# Altium PCB Stingray.pcbdoc (part 2 of 2)
Units mil, origin at the board's own origin, x right, y up, seen from the top; angles counter-clockwise.
Board outline 6200 x 5620 mil, 2 copper layers (Top Layer, Bottom Layer); 126 components, 151 nets, 467 pads, 226 vias.
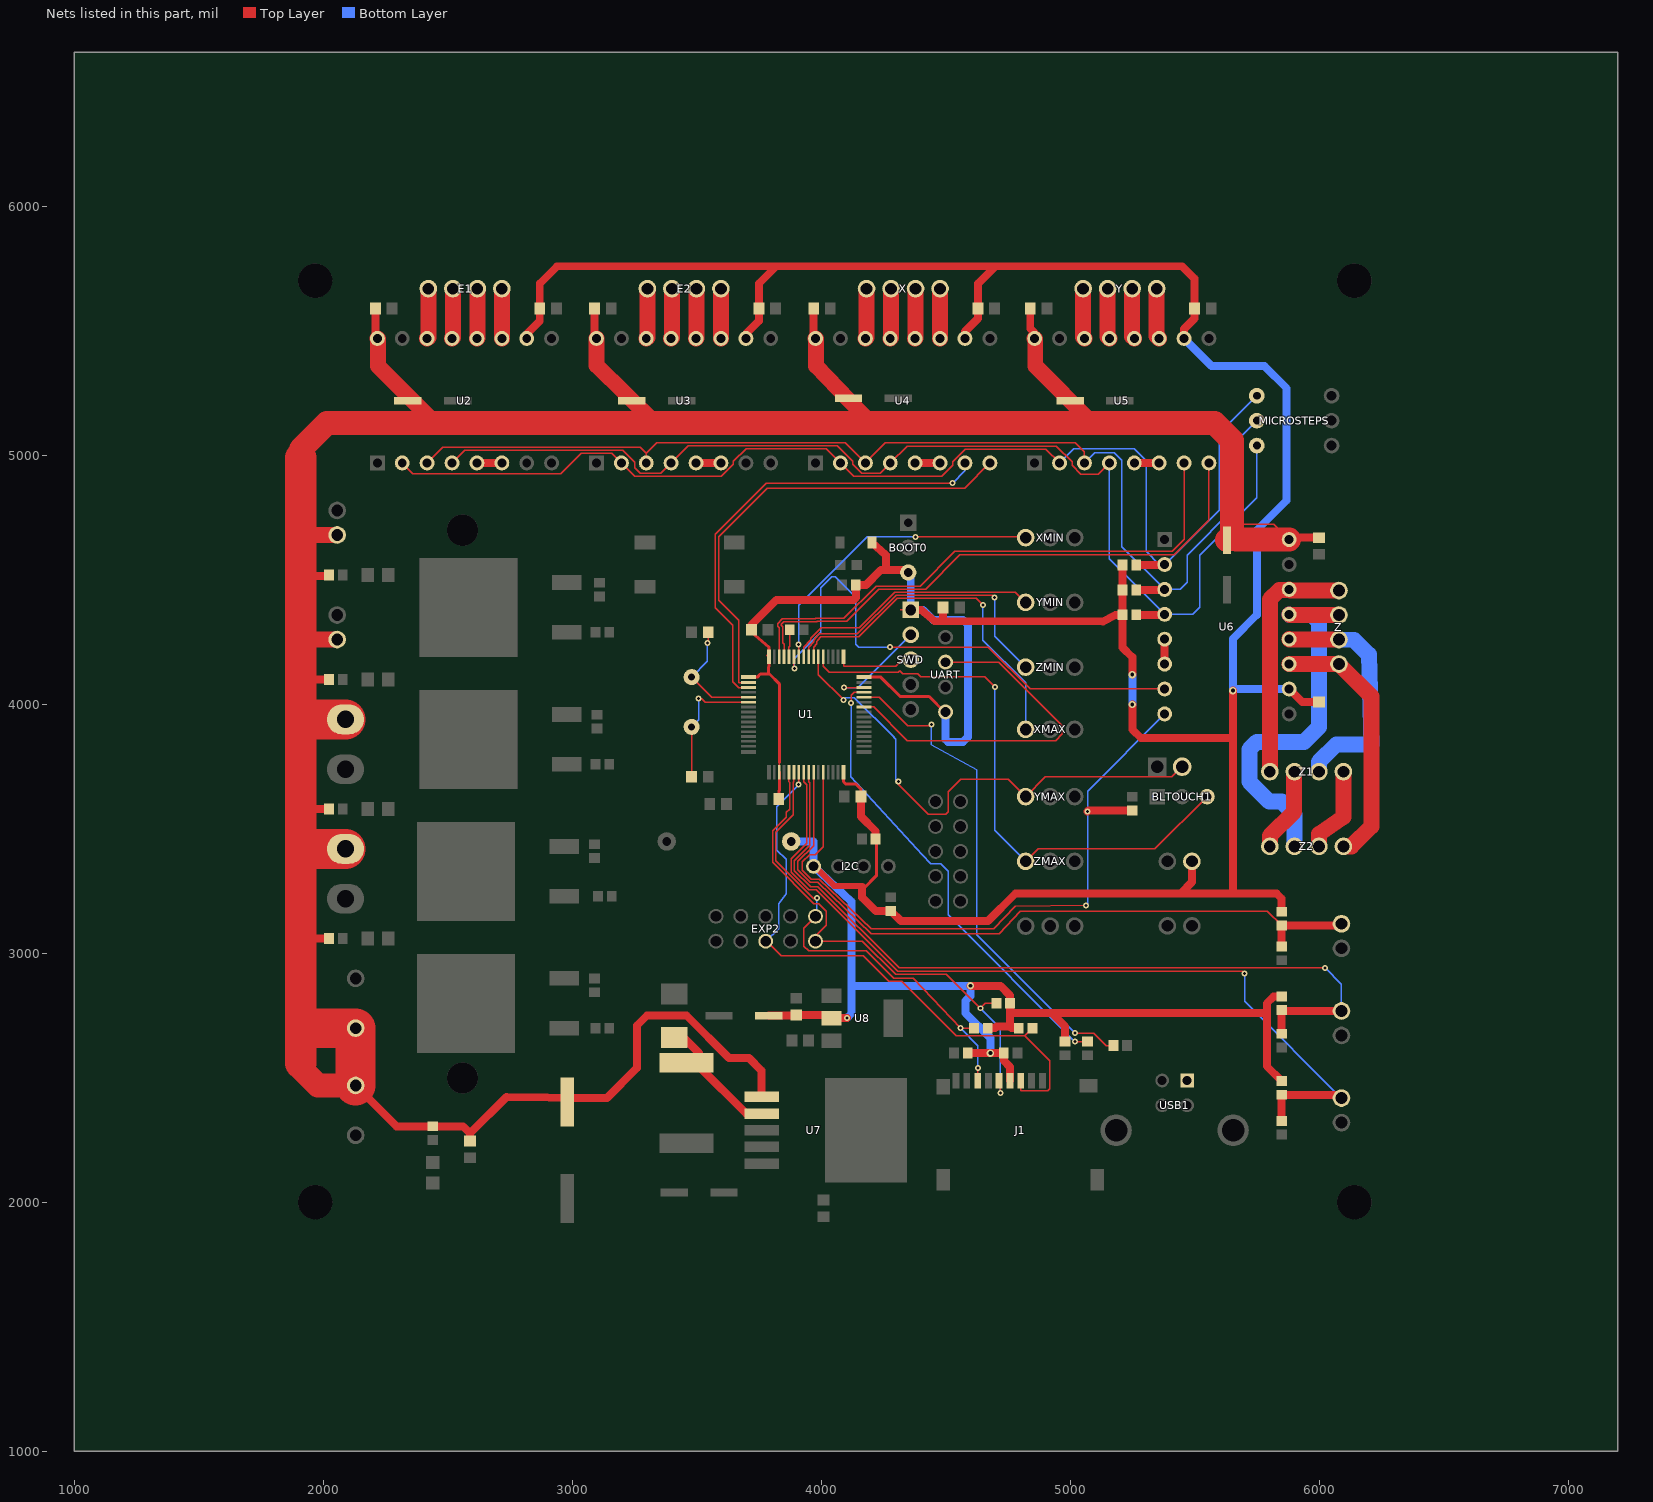
[diagram p2: the nets of this part, all layers, seen from the top]

## Via types
v1: diameter 24.4, hole 12, Top Layer to Bottom Layer, 126 vias
v2: diameter 24, hole 12, Top Layer to Bottom Layer, 50 vias
v3: diameter 40, hole 20, Top Layer to Bottom Layer, 44 vias
v4: diameter 30, hole 15, Top Layer to Bottom Layer, 6 vias

## Nets (pads, with @x,y where several pads share a name; then routed paths per layer and width w, separated by ;. In a path a pad name is that pad's centre, name@x,y a point inside that pad or via, vN(x,y) a via of type N, cw(c..) or ccw(c..) an arc to the next point about the centre after c; other vN are vias at no path point) (continued)
SPI_MISO: EXP2.1 J1.7 R31.1 U1.22 | length 1946.8
  Top Layer w6: U1.22@3891,3727.9 3891,3689.3 3888.6,3686.9 3888.6,3558.1 3817.5,3487 3817.5,3372.5 3970,3220 v2(3982.9,3222.2) ; EXP2.1@3977.6,3149.3 3930,3101.7 3930,3030 3950,3010 4181.3,3010 4291.2,2900.1 4369.9,2900.1 v2(4560,2700) ; J1.7@4629,2489 4629,2529.6 4629,2539 v2(4630,2540) ; v2(4560,2700) 4585.2,2700 ; v2(4560,2700) 4585.2,2700 ; 4585.2,2700 R31.1@4613.95,2700 4585.2,2700
  Bottom Layer w6: EXP2.1@3977.6,3149.3 3982.9,3154.6 v2(3982.9,3222.2) ; v2(4560,2700) 4630,2630 v2(4630,2540)
SPI_MOSI: EXP2.6 J1.3 R26.2 U1.23 | length 2419
  Top Layer w6: EXP2.6@3777.6,3049.3 3789.8,3040.2 3840,2990 4169,2990 4271.1,2887.9 4324,2887.9 4542.7,2669.2 4818.2,2669.2 ; v2(3910,3678.2) U1.23@3910,3727.9 ; J1.3@4802,2489 4802,2448.4 4910.4,2448.4 4919.1,2457 4919.1,2568.4 4818.2,2669.2 ; R26.2@4849.1,2700 4818.2,2669.2
  Bottom Layer w6: EXP2.6@3777.6,3049.3 3830,3100 3830,3200 3859.6,3239.9 3859.6,3377.5 3821.7,3415.5 3821.7,3589.8 v2(3910,3678.2)
SPI_SCK: EXP2.2 J1.5 R32.1 U1.21 | length 2095.5
  Top Layer w6: U1.21@3871,3727.9 3871,3689.3 3873.2,3687.1 3873.2,3580.2 3861,3568.1 3861,3547.7 3805.3,3492 3805.3,3365.4 3970.6,3200.1 3990,3200.1 4020,3170 4020,3113.1 3977.6,3070.6 3977.6,3050 4166.1,3050 4299.2,2917 4503,2917 v2(4640,2780) 4660,2800 4675.2,2800 R32.1@4703.95,2800 ; J1.5@4715,2489 4720,2484 v2(4720,2440)
  Bottom Layer w6: v2(4640,2780) 4720,2700 v2(4720,2440)
SWDCLK: SWD.3 U1.49 | length 319.6
  Top Layer w6: U1.49@4090.1,4191.9 4090.1,4153.3 4299.3,4153.3 4326,4180 SWD.3@4360,4180
SWDIO: SWD.2 U1.46 | length 435.3
  Top Layer w6: v2(4092.3,4068) U1.46@4172.1,4068
  Bottom Layer w6: v2(4092.3,4068) 4148,4068 SWD.2@4360,4280
TBED: C18.2 R15.1 TBED.2 U1.24 | length 3449
  Top Layer w6: U1.24@3930,3727.9 3930,3689.3 3942.1,3677.2 3942.1,3442.1 3880,3380 3880,3327 3951.3,3255.7 3981.2,3255.7 4307.8,2929.1 5692.1,2929.1 v2(5701.2,2920) ; R15.1@5850,2432.45 R15.1@5865.4,2432.4
  Top Layer w32: C18.2@5850,2327.5 R15.1@5850,2432.45 6076.8,2432.4 TBED.2@6090,2419.25
  Bottom Layer w6: v2(5701.2,2920) 5701.2,2808.1 TBED.2@6090,2419.25
TEXTR1: C10.2 R16.1 TEXTR1.2 U1.25 | length 3249.7
  Top Layer w6: U1.25@3950,3727.9 3950,3689.3 3954.3,3685 3954.3,3434.3 3893,3373 3893,3333 3958.2,3267.8 3986,3268 4314.7,2941.9 v2(6024.6,2941.9) ; R16.1@5850,2769.2 R16.1@5850,2772.45
  Top Layer w32: C10.2@5850,2677.5 5850,2769.2 TEXTR1.2@6090,2769.25
  Bottom Layer w6: v2(6024.6,2941.9) 6090,2876.5 TEXTR1.2@6090,2769.25
TEXTR2: C9.2 R17.1 TEXTR2.2 U1.26 | length 2855.3
  Top Layer w6: U1.26@3970,3727.9 3970,3689.3 3970,3433 3907,3370 3907,3336 3956.4,3286.6 3987.1,3286.6 4201.1,3080 4715,3080 4800,3170 5792.4,3170 R17.1@5850,3112.45
  Top Layer w32: C9.2@5850,3027.5 R17.1@5850,3112.45 6083.2,3112.4 TEXTR2.2@6090,3119.25
TX: U1.42 UART.3 | length 1472.4
  Top Layer w6: U1.42@4172.1,3990 4210.7,3990 4345.5,3855.2 4942.9,3855.2 4969.3,3881.6 4969.3,3915.1 4714.4,4170 UART.3@4500,4170
U1_60: R21.1 U1.60 | length 109.4
  Top Layer w6: U1.60@3871,4191.9 3871,4230.6 3874,4233.5 3874,4269.2 R21.1@3873.95,4300
U2_2: MICROSTEPS.6 R1.1 U2.2 U3.2 U4.2 U5.2 U6.2 | length 4702.1
  Top Layer w6: U2.2@2317.76,4970.08 2360.5,4927.4 2953.7,4927.4 3035.7,5009.3 3158.5,5009.3 U3.2@3197.76,4970.08 3251.1,4916.8 3599.8,4916.8 3647.8,4964.8 3647.8,4975.9 3699.3,5027.4 4020.4,5027.4 U4.2@4077.76,4970.08 4130.8,4917 4484.7,4917 4527.8,4960.2 4527.8,4975.4 4578.3,5025.9 4901.9,5025.9 U5.2@4957.76,4970.08
  Top Layer w32: R1.1@5266.1,4560 5377.8,4560 U6.2@5380.08,4562.24
  Bottom Layer w6: U5.2@4957.76,4970.08 5014.4,5026.7 5258.2,5026.7 5305.7,4979.2 5305.7,4615.5 5359,4562.2 U6.2@5380.08,4562.24 5598.5,4780.7 5598.5,5088.5 MICROSTEPS.6@5750,5240
U2_3: MICROSTEPS.5 R2.1 U2.3 U3.3 U4.3 U5.3 U6.3 | length 4612.4
  Top Layer w6: U2.3@2417.76,4970.08 2481.3,5033.6 3273.5,5033.6 3297.8,5009.3 ; U3.3@3297.76,4970.08 3297.8,5009.3 ; U5.3@5057.76,4970.08 5057.8,5014.5 5021.4,5050.9 4258.6,5050.9 U4.3@4177.76,4970.08 4096.1,5051.7 3340.1,5051.7 3297.8,5009.3
  Top Layer w32: R2.1@5266.1,4460 5377.8,4460 U6.3@5380.08,4462.24
  Bottom Layer w6: U5.3@5057.76,4970.08 5099.5,5011.8 5177.1,5011.8 5207.8,4981.2 5207.8,4634.5 U6.3@5380.08,4462.24 5442.2,4462.2 5470,4490 5470,4600 5660,4790 5660,5050 MICROSTEPS.5@5750,5140
U2_4: MICROSTEPS.4 R3.1 U2.4 U3.4 U4.4 U5.4 U6.4 | length 4641.4
  Top Layer w6: U2.4@2517.76,4970.08 2569.1,5021.5 3202.9,5021.5 3252.1,4972.3 3252.1,4950.6 3273.7,4928.9 3356.6,4928.9 U3.4@3397.76,4970.08 3467.3,5039.6 4064.6,5039.6 4127.8,4976.4 4127.8,4964.8 4163.4,4929.2 4236.9,4929.2 U4.4@4277.76,4970.08 4345.8,5038.1 4945.1,5038.1 5007.8,4975.4 5007.8,4960.2 5042.4,4925.6 5113.3,4925.6 U5.4@5157.76,4970.08
  Top Layer w32: R3.1@5266.1,4360 5377.8,4360 U6.4@5380.08,4362.24
  Bottom Layer w6: U5.4@5157.76,4970.08 5157.8,4584.6 U6.4@5380.08,4362.24 5492.2,4362.2 5520,4390 5520,4600 5750,4830 MICROSTEPS.4@5750,5040
U2_5: U2.5 U2.6 | length 100
  Top Layer w32: U2.5@2617.76,4970.08 U2.6@2717.76,4970.08
U2_11: E1.4 U2.11 | length 199.9
  Top Layer w64: E1.4@2717.7,5670 2717.7,5470.2 U2.11@2717.76,5470.08
U2_12: E1.3 U2.12 | length 200.5
  Top Layer w64: U2.12@2617.76,5470.08 2619.3,5471.6 E1.3@2619.3,5670
U2_13: E1.2 U2.13 | length 201.2
  Top Layer w64: U2.13@2517.76,5470.08 2520.9,5473.2 E1.2@2520.9,5670
U2_14: E1.1 U2.14 | length 201.8
  Top Layer w64: U2.14@2417.76,5470.08 2422.4,5474.7 E1.1@2422.35,5670
U3_5: U3.5 U3.6 | length 100
  Top Layer w32: U3.5@3497.76,4970.08 U3.6@3597.76,4970.08
U3_11: E2.4 U3.11 | length 199.9
  Top Layer w64: E2.4@3597.7,5670 3597.7,5470.2 U3.11@3597.76,5470.08
U3_12: E2.3 U3.12 | length 200.5
  Top Layer w64: U3.12@3497.76,5470.08 3499.3,5471.6 E2.3@3499.3,5670
U3_13: E2.2 U3.13 | length 201.2
  Top Layer w64: U3.13@3397.76,5470.08 3400.9,5473.2 E2.2@3400.9,5670
U3_14: E2.1 U3.14 | length 201.8
  Top Layer w64: U3.14@3297.76,5470.08 3302.4,5474.7 E2.1@3302.35,5670
U4_5: U4.5 U4.6 | length 100
  Top Layer w32: U4.5@4377.76,4970.08 U4.6@4477.76,4970.08
U4_11: U4.11 X.4 | length 199.9
  Top Layer w64: X.4@4477.7,5670 4477.7,5470.2 U4.11@4477.76,5470.08
U4_12: U4.12 X.3 | length 200.5
  Top Layer w64: U4.12@4377.76,5470.08 4379.3,5471.6 X.3@4379.3,5670
U4_13: U4.13 X.2 | length 201.2
  Top Layer w64: U4.13@4277.76,5470.08 4280.9,5473.2 X.2@4280.9,5670
U4_14: U4.14 X.1 | length 201.8
  Top Layer w64: U4.14@4177.76,5470.08 4182.4,5474.7 X.1@4182.35,5670
U5_5: U5.5 U5.6 | length 100
  Top Layer w32: U5.5@5257.76,4970.08 U5.6@5357.76,4970.08
U5_11: U5.11 Y.4 | length 204.1
  Top Layer w64: Y.4@5347.7,5670 5347.7,5480.2 U5.11@5357.76,5470.08
U5_12: U5.12 Y.3 | length 203.4
  Top Layer w64: Y.3@5249.3,5670 5249.3,5478.6 U5.12@5257.76,5470.08
U5_13: U5.13 Y.2 | length 202.8
  Top Layer w64: Y.2@5150.9,5670 5150.9,5477 U5.13@5157.76,5470.08
U5_14: U5.14 Y.1 | length 202.1
  Top Layer w64: Y.1@5052.35,5670 5052.4,5475.5 U5.14@5057.76,5470.08
U6_5: U6.5 U6.6 | length 100
  Top Layer w32: U6.6@5380.08,4162.24 U6.5@5380.08,4262.24
U7_2: D1.2 L5.1 U7.2 | length 510.4
  Top Layer w32: D1.2@3410,2663 3447,2663 3510,2600 3510,2546 3699.1,2356.9 U7.2@3762,2356.9
undefined: 
USB_VCC: USB1.1
USBDM: R22.1 U1.44 | length 2004.9
  Top Layer w6: U1.44@4172.1,4029 4233.5,4029 4347,3915.5 4438.5,3915.5 v2(4442.5,3919.5) ; v2(5020,2680) 5095.2,2680 5145.2,2630 R22.1@5173.95,2630
  Bottom Layer w6: v2(4442.5,3919.5) 4442,3838 4624.6,3737.4 4624.6,3075.4 v2(5020,2680)
USBDP: R18.1 U1.45 | length 1885.3
  Top Layer w6: v2(4120.9,4005.6) 4120.9,4036.5 4133.4,4049 U1.45@4172.1,4049 ; v2(5020.4,2646) R18.1@5070,2646.05
  Bottom Layer w6: v2(4120.9,4005.6) 4120,3710 4406.4,3396.8 4440,3360 4480,3360 4510,3330 4510,3155.2 5019.2,2646 v2(5020.4,2646)
VCC: +3.3V.2 BOOT0.3 C12.1 C13.1 C14.1 C15.1 C16.1 C19.2 C23.1 C24.1 C25.1 C26.1 C27.1 D5.2 I2C.1 J1.4 L1.1 R1.2 R2.2 R3.2 R15.2 R16.2 R17.2 R19.2 R23.1 R25.1 R26.1 R27.2 R28.2 R30.2 R31.2 R32.2 SWD.1 U1.1 U1.19 U1.32 U1.48 U1.64 U2.10 U3.10 U4.10 U5.10 U6.10 U8.2 UART.1 | length 19492.8
  Top Layer w6: C13.1@3734.7,5590 C13.1@3750.1,5590 ; U1.64@3790.1,4191.9 U1.64@3790.1,4211.3 ; U1.19@3832,3727.9 3832,3766.6 ; R19.2@4139.1,4480 4144.2,4480 R19.2@4149.3,4480 ; U1.48@4172.1,4109.9 U1.48@4191.4,4109.9 ; 4317.4,4380 SWD.1@4360,4380 SWD.1@4381.3,4380 ; C14.1@4614.7,5590 C14.1@4630.1,5590 ; R23.1@4734,2594.5 R23.1@4733.95,2600 ; 4759.1,2706.1 4765.2,2700 ; C15.1@5484.7,5590 C15.1@5500.1,5590 ; 5489.3,3266.1 +3.3V.2@5489.3,3370 ; R17.2@5850,3167.5 5850,3196.3
  Top Layer w12: U1.1@3708.1,4109.9 3743.7,4109.9 3755.8,4122 3788.3,4122 ; C24.1@3720.05,4300 3720,4290 3790,4230 U1.64@3790.1,4191.9 ; U1.64@3784.4,4197.6 U1.64@3790.1,4191.9 ; 3790,4122 3788.3,4122 ; C26.1@3830.1,3620 3830.1,3652.7 3832,3654.6 U1.19@3832,3727.9 ; 3832,3766.6 3832,4083 3792.4,4122.6 3788.3,4122 ; U1.32@4090.1,3727.9 4090.1,3689.9 4100,3680 4140,3680 4160,3660 C25.1@4160.05,3630 C25.1@4160.1,3630 ; 4164.9,3271.8 4173.3,3263.3 4222,3312 4222,3460 R28.2@4219.05,3460 ; U1.48@4172.1,4109.9 4240,4109.9 ; 4240,4110 4240,4109.9 ; UART.1@4500,3970 4496,3970 4434,4032 4317.9,4032 4240,4109.9 ; 3788.3,4122 3788.3,4151.5 3790.1,4153.3 U1.64@3790.1,4191.9
  Top Layer w24: I2C.1@3970,3350 3972,3352 4052.2,3271.8 4164.9,3271.8
  Top Layer w32: U2.10@2817.76,5470.08 2817.8,5487.8 2870,5540 2870,5589.9 2870.1,5590 C12.1@2870.05,5590 2870,5690 2940,5760 3820,5760 ; U3.10@3697.76,5470.08 3697.8,5487.8 3750,5540 3750,5589.9 3750.1,5590 C13.1@3750.05,5590 3750,5690 3820,5760 ; C24.1@3720.05,4300 3720,4320 3820,4420 4130,4420 4140,4430 R19.2@4139.05,4480 ; C27.1@3790,2750 3897,2750 C19.2@3900,2753.05 4028.9,2753 U8.2@4041.95,2740 ; U8.2@4051.6,2740 v2@4100,2740 ; 4090.4,2740 4091.5,2741.1 v2(4104.1,2741.1) ; R19.2@4139.1,4480 4180,4480 4240,4540 4340,4540 BOOT0.3@4350,4530 ; C25.1@4160.1,3630 4160,3629.9 4160,3550 4219.1,3490.9 R28.2@4219.1,3460 ; 4164,3268 4164.9,3225.1 4220,3170 4220.95,3170.95 R27.2@4280,3170.95 4320.95,3130 4670,3130 4780,3240 5442.2,3240 5489.3,3287.1 5489.3,3287.2 +3.3V.2@5489.3,3370 ; D5.2@4204,4650 4260,4600 4260,4542.6 4257.4,4540 ; SWD.1@4381.3,4380 4402.6,4380 4455.7,4335.2 5132,4334 5182.2,4360 R3.2@5210.95,4360 ; C23.1@4490.1,4390 4490.1,4335.9 4490.8,4335.1 ; U4.10@4577.76,5470.08 4577.8,5497.8 4590,5510 4630,5550 4630,5589.9 4630.1,5590 4630.1,5690 4700,5760 ; R30.2@4589.1,2600 v4(4680,2600) 4728.4,2600 4734,2594.5 4734,2569.2 4759,2544.1 J1.4@4759,2489 ; v4(4600,2870) 4720,2870 4759.1,2830.9 4759.1,2800 4759.1,2734.2 ; R31.2@4669.1,2700 4697.8,2700 4704,2706.1 4759.1,2706.1 4759.1,2734.2 ; 4765.2,2700 R26.1@4793.95,2700 ; R25.1@4980,2646.05 4980,2674.8 4980,2707.5 4927.5,2760 ; R1.2@5210.95,4560 R2.2@5210.95,4460 R3.2@5210.95,4360 ; v4(5250,4000) 5250,3900 5285.4,3864.6 5654,3864.6 ; v4(5250,4120) 5250,4190 5211,4229 R3.2@5210.95,4360 ; 5428.6,3240 5830,3240 5850,3220 R17.2@5850,3167.5 ; U5.10@5457.76,5470.08 5457.8,5507.8 5500,5550 5500,5589.9 5500.1,5590 C15.1@5500.05,5590 5500,5710 5450,5760 4700,5760 ; 5654,3240 v4(5654.03,4055.97) ; 5790,2761.6 5788.4,2760 4927.5,2760 ; R15.2@5850,2487.5 5790,2547.5 5790,2800 5817.6,2827.5 R16.2@5850,2827.5 ; U6.10@5880.08,4062.24 5932.4,4009.9 C16.1@6000,4009.9 ; 3820,5760 4700,5760 ; 4759.1,2734.2 4759.1,2760 4927.5,2760
  Bottom Layer w32: L1.1@3880,3450 3970,3450 I2C.1@3970,3350 ; v2@4104.1,2741 4121.3,2758.3 4121.3,3208.7 I2C.1@3970,3350 ; 4121.3,2870.2 4599.8,2870.2 v4(4600,2870) 4600,2830 4580,2810 4580,2760 4680,2660 v4(4680,2600) ; BOOT0.3@4350,4530 4360,4520 SWD.1@4360,4380 4410,4380 4450,4340 4570,4340 4590,4320 4590,3870 4570,3850 4510,3850 4500,3860 UART.1@4500,3970 ; v4(5250,4000) v4(5250,4120) ; U5.10@5457.76,5470.08 5567.8,5360 5780,5360 5870,5270 5870,4820 5750,4700 5750,4360 5654,4264 v4(5654.03,4055.97) 5660.3,4062.2 U6.10@5880.08,4062.24 ; I2C.1@3970,3350 3970,3360 I2C.1@3970,3350
VIN: C1.1 C2.1 C3.1 C4.1 C5.1 C6.1 C7.1 C8.1 C17.1 C33.2 C34.1 C35.1 EXTRUDER1.1 EXTRUDER2.1 FAN1.2 FAN2.2 HEATBED.1 POWER.2 R5.1 R6.1 R11.1 R14.1 R24.1 U2.16 U3.16 U4.16 U5.16 U6.16 U7.1 | length 14242.4
  Top Layer w6: C34.1@2980,2404 2980,2420 3080,2420 3080,2419 3080,2424 ; C17.1@3207.9,5220 C17.1@3240,5220 ; C3.1@4057.9,5220 4057.9,5230 C3.1@4110,5230 ; C2.1@4967.9,5220 4984,5220 C2.1@5000,5220 ; C1.1@5630,4660 5630,4724.2 5790.9,4724.2 5818.1,4724.2 U6.16@5880.08,4662.24
  Top Layer w32: 1900,3062.7 1902.7,3060 R5.1@2023.95,3060 ; 1900,3583 1903,3580 R6.1@2023.95,3580 ; 1900,4090.5 1909.5,4100 R11.1@2023.95,4100 ; 1900,4515.2 2019.1,4515.2 R14.1@2021.3,4517.4 ; POWER.2@2130.71,2470 2294.7,2306 R24.1@2440,2306.05 2561.6,2306 2590,2277.6 ; C4.1@2210.1,5590 2210.1,5477.8 U2.16@2217.76,5470.08 ; C33.2@2590,2246.85 2590,2277.6 ; C34.1@2980,2404 2980,2420 3140,2420 3260,2540 3260,2710 3300,2750 3460,2750 3630,2580 3710,2580 3760,2530 3760,2425.9 U7.1@3762,2423.9 ; 3072.11,2420 2736.4,2424 2590,2277.6 ; C5.1@3090.1,5590 3090.1,5477.8 U3.16@3097.76,5470.08 ; C6.1@3970.1,5590 3970.1,5477.8 U4.16@3977.76,5470.08 ; C7.1@4840,5581.6 4840,5510 4857.8,5492.2 U5.16@4857.76,5470.08 ; U6.16@5880.08,4662.24 5887.8,4669.9 C8.1@6000,4669.9
  Top Layer w64: 1900,4250.9 1909.8,4260.7 2003.7,4260.7 FAN1.2@2056.4,4260.7 ; 1900,4685.1 1904.4,4680.7 FAN2.2@2056.4,4680.7 ; U2.16@2217.76,5470.08 2220,5467.8 2220,5360 2340,5240 2450,5130 ; U3.16@3097.76,5470.08 3097.8,5362.2 3335,5130 ; U4.16@3977.76,5470.08 3980,5467.8 3980,5360 4200,5130 ; U5.16@4857.76,5470.08 4860,5467.8 4860,5360 5090,5130
  Top Layer w96: 1900,2550 1980,2470 POWER.2@2130.71,2470 ; 1910,5024.8 2015.2,5130 4075.9,5130 ; 4019.6,5130 4075.9,5130 ; C1.1@5630,4660 5650,4680 ; U6.16@5880.08,4662.24 5667.8,4662.2 5650,4680 ; 4075.9,5130 4200,5130 5090,5130 5580,5130 5650,5060 5650,4680
  Top Layer w128: 1910,2560 1910,4990
  Top Layer w160: 1940,3420 1930,3420 EXTRUDER1.1@2090,3420 ; 2010,3940 1930,3940 EXTRUDER2.1@2090,3940 ; 2040,2700 1940,2700 HEATBED.1@2130.71,2700 POWER.2@2130.71,2470
X_DIR: U1.2 U4.8 | length 1870.1
  Top Layer w6: U1.2@3708.1,4088 3669.4,4088 3669.4,4338 3588.1,4419.3 3588.1,4672.9 3783.6,4868.4 4576.1,4868.4 U4.8@4677.76,4970.08
X_STP: U1.3 U4.7 | length 1834.2
  Top Layer w6: U1.3@3708.1,4068 3669.4,4068 3645.1,4092.3 3645.1,4317.7 3574.4,4388.4 3574.4,4684 3779.9,4889.5 v2(4528.3,4889.5)
  Bottom Layer w6: v2(4528.3,4889.5) 4577.8,4939 U4.7@4577.76,4970.08
XMAX: U1.55 XMAX.1 | length 1389.6
  Top Layer w6: U1.55@3970,4191.9 3970,4230.6 3982.9,4243.5 3982.9,4253 3985.6,4255.7 3985.6,4258.8 3998,4271.2 4150.6,4271.2 4306.3,4426.9 4623.1,4426.9 v2(4650,4400)
  Bottom Layer w6: v2(4650,4400) 4650,4258.6 4821.6,4087 XMAX.1@4821.55,3900
XMIN: U1.58 XMIN.1 | length 1232.8
  Top Layer w6: U1.58@3910,4191.9 v2(3910,4240.7) ; v2(4378.8,4672.9) 4818.7,4672.9 XMIN.1@4821.55,4670
  Bottom Layer w6: v2(3910,4240.7) 3910,4398.1 4184.8,4672.9 v2(4378.8,4672.9)
Y1_1: C20.1 U1.6 Y1.1 | length 531.2
  Top Layer w6: Y1.1@3480,3910 3480.1,3909.9 C20.1@3480.1,3710 ; v2(3508.4,4023.6) 3521.1,4023.6 3535.7,4009 U1.6@3708.1,4009
  Bottom Layer w6: Y1.1@3480,3910 3508.4,3938.4 v2(3508.4,4023.6)
Y1_2: C11.1 U1.5 Y1.2 | length 469.4
  Top Layer w6: Y1.2@3480,4110 3561,4029 U1.5@3708.1,4029 ; v2(3543.1,4247.8) 3546.9,4251.6 C11.1@3546.9,4290
  Bottom Layer w6: Y1.2@3480,4110 3543.1,4173.1 v2(3543.1,4247.8)
Y_DIR: U1.61 U5.8 | length 2256
  Top Layer w6: U1.61@3851,4191.9 3851,4242.7 3845.2,4248.5 3845.2,4313 3839.3,4318.8 3839.3,4321.3 3849.4,4331.4 3982.2,4331.4 3984.1,4333.3 4102.2,4333.3 4232.1,4463.3 4419.8,4463.3 4557.8,4601.4 5418.6,4601.4 5557.8,4740.6 U5.8@5557.76,4970.08
Y_STP: U1.62 U5.7 | length 2214.5
  Top Layer w6: U1.62@3832,4191.9 3832,4230.6 3832,4309 3826,4315 3826,4325.1 3844.4,4343.5 3977.2,4343.5 3979.1,4345.5 4091.7,4345.5 4221.6,4475.4 4397.6,4475.4 4537.4,4615.2 5409.9,4615.2 5457.8,4663.1 U5.7@5457.76,4970.08
YMAX: BLTOUCH2.2 U1.54 YMAX.1 | length 2059.8
  Top Layer w6: U1.54@3989,4191.9 3989,4119.6 v2(4090.1,4018.5) ; v1(4310,3690) 4310,3680 4430,3560 4500,3560 4510,3570 4510,3650 4560,3700 4590,3700 4751.6,3700 YMAX.1@4821.55,3630 4900.7,3709.1 5409.2,3709.1 BLTOUCH2.2@5450,3750
  Bottom Layer w6: v2(4090.1,4018.5) 4099.3,4027.7 4133.9,4027.7 4292.9,3868.7 ; 4290.8,3870.8 4290.8,3869.2 4300,3860 4300,3700 v1(4310,3690)
YMIN: U1.57 YMIN.1 | length 1042.8
  Top Layer w6: U1.57@3930,4191.9 3930,4230.6 3958.7,4259.3 3958.7,4266.2 4001.5,4309.1 4153.6,4309.1 4295.7,4451.2 4780.4,4451.2 YMIN.1@4821.55,4410
Z1_1: U6.14 Z1.1 Z.1 | length 988.3
  Top Layer w64: Z1.1@5802.35,3730 5802.4,4422.3 5840,4460 5877.8,4460 U6.14@5880.08,4462.24 5884.7,4457.6 Z.1@6080,4457.65
Z1_2: Z1.2 Z2.1 | length 340.8
  Top Layer w64: Z2.1@5802.35,3430 5802.4,3472.3 5900,3570 5900,3729.1 Z1.2@5900.9,3730
Z1_3: U6.12 Z1.3 Z.3 | length 985
  Top Layer w64: U6.12@5880.08,4262.24 5881.6,4260.7 Z.3@6080,4260.7
  Bottom Layer w64: Z1.3@5999.3,3730 5999.3,3769.2 6070,3840 6210,3840 6200,4200 6140,4260 6080.8,4260 Z.3@6080,4260.7
Z1_4: Z1.4 Z2.3 | length 351.2
  Top Layer w64: Z2.3@5999.3,3430 6000,3480 6097.7,3547.7 Z1.4@6097.7,3730
Z2_2: U6.13 Z2.2 Z.2 | length 1565.9
  Top Layer w64: U6.13@5880.08,4362.24 5883.2,4359.1 Z.2@6080,4359.1
  Bottom Layer w64: U6.13@5880.08,4362.24 5882.3,4360 5970,4360 6000,4330 6000,3910 5940,3850 5750,3850 5720,3820 5720,3690 5800,3610 5850,3610 5900.9,3559.1 Z2.2@5900.9,3430
Z2_4: U6.11 Z2.4 Z.4 | length 1051.5
  Top Layer w64: U6.11@5880.08,4162.24 5880.2,4162.3 6080,4162.3 6210,4032.3 6210,3510 6130,3430 Z2.4@6097.7,3430
Z_DIR: R29.1 U1.28 U6.8 | length 2806.2
  Top Layer w6: U1.28@4009,3727.9 4009,3428.2 3977.1,3396.3 3955.3,3396.3 3925,3369 3925,3335 3961,3299 3992.6,3298.8 4200.9,3100 4694,3098.8 4780,3190 v2(5063.9,3193.2)
  Top Layer w32: v2(5070,3570) 5074,3573.9 R29.1@5250,3573.9
  Bottom Layer w6: v2@5070,3193.9 v2(5070,3570) 5063.9,3570 5063.9,3569.3 5070,3569.3 5070,3652.1 U6.8@5380.08,3962.24
Z_STP: U1.59 U6.7 | length 2115.9
  Top Layer w6: U1.59@3891,4191.9 3891,4153.3 3892.4,4151.9 v2(3892.4,4144.2) ; v2(4277,4230) 4671.6,4230 4839.3,4062.2 U6.7@5380.08,4062.24
  Bottom Layer w6: v2(3892.4,4144.2) 3892.4,4184.5 3998.4,4290.5 3998.4,4469.3 4043.1,4514 4056.7,4514 4139.6,4431.1 4139.6,4241.7 4151.8,4229.6 4276.6,4229.6 v2(4277,4230)
ZMAX: BLTOUCH1.3 U1.53 ZMAX.1 | length 2354.8
  Top Layer w6: U1.53@4009,4191.9 4009,4153.3 4033.5,4128.8 4309.1,4128.8 4315.2,4134.9 4327.5,4122.6 4387.9,4122.6 4400,4110.4 4658.1,4110.4 v2(4697.6,4071) ; ZMAX.1@4821.55,3370 4871.9,3420.3 5340.3,3420.3 BLTOUCH1.3@5550,3630
  Bottom Layer w6: v2(4697.6,4071) 4697.6,3494 ZMAX.1@4821.55,3370
ZMIN: U1.56 ZMIN.1 | length 1213
  Top Layer w6: U1.56@3950,4191.9 3950,4230.6 3970.8,4251.4 3970.8,4258.1 3973.5,4260.7 3973.5,4263.9 3992.9,4283.3 4145.6,4283.3 4301.3,4439 4687.8,4439 v2(4696.9,4429.9)
  Bottom Layer w6: v2(4696.9,4429.9) 4696.9,4274.6 ZMIN.1@4821.55,4150
pads on no net: U8.4
copper on no net:
  other v1: 2442.67,2667.33 2508.33,2667.33 2574,2667.33 2639.67,2667.33 2705.33,2667.33 2442.67,2733.67 2508.33,2733.67 2574,2733.67 2639.67,2733.67 2705.33,2733.67 2442.67,2800 2508.33,2800 2574,2800 2639.67,2800 2705.33,2800 2442.67,2866.33 2508.33,2866.33 2574,2866.33 2639.67,2866.33 2705.33,2866.33 2442.67,2932.67 2508.33,2932.67 2574,2932.67 2639.67,2932.67 2705.33,2932.67 2442.67,3197.33 2508.33,3197.33 2574,3197.33 2639.67,3197.33 2705.33,3197.33 2442.67,3263.67 2508.33,3263.67 2574,3263.67 2639.67,3263.67 2705.33,3263.67 2442.67,3330 2508.33,3330 2574,3330 2639.67,3330 2705.33,3330 2442.67,3396.33 2508.33,3396.33 2574,3396.33 2639.67,3396.33 2705.33,3396.33 2442.67,3462.67 2508.33,3462.67 2574,3462.67 2639.67,3462.67 2705.33,3462.67 2452.67,3727.33 2518.33,3727.33 2584,3727.33 2649.67,3727.33 2715.33,3727.33 2452.67,3793.67 2518.33,3793.67 2584,3793.67 2649.67,3793.67 2715.33,3793.67 2452.67,3860 2518.33,3860 2584,3860 2649.67,3860 2715.33,3860 2452.67,3926.33 2518.33,3926.33 2584,3926.33 2649.67,3926.33 2715.33,3926.33 2452.67,3992.67 2518.33,3992.67 2584,3992.67 2649.67,3992.67 2715.33,3992.67 2452.67,4257.33 2518.33,4257.33 2584,4257.33 2649.67,4257.33 2715.33,4257.33 2452.67,4323.67 2518.33,4323.67 2584,4323.67 2649.67,4323.67 2715.33,4323.67 2452.67,4390 2518.33,4390 2584,4390 2649.67,4390 2715.33,4390 2452.67,4456.33 2518.33,4456.33 2584,4456.33 2649.67,4456.33 2715.33,4456.33 2452.67,4522.67 2518.33,4522.67 2584,4522.67 2649.67,4522.67 2715.33,4522.67

## Polygon pours and split planes (outlines as drawn)
VIN on Bottom Layer (solid): 1760,4730 2160,4720 2260,4650 2260,2480 2200,2400 1960,2400 1790,2400
GND on Bottom Layer (solid): 1500,6090 6670,6120 6700,1570 1640,1500

## Other copper
Top Layer:
  region net VIN: 1950,2680 2080,2640 2070,2490 1970,2500
  region net LED1_2: 2180,2810 2380,2600 2420,2860
  region net LED2_2: 2140,3290 2380,3530 2450,3280 2450,3290
  region net LED3_2: 2140,3820 2390,4060 2460,3810
  region net GND: 3730,2150 3860,2150 3850,2110 3760,2110
Bottom Layer:
  rectangle: 2387,4191 2780,4589
  rectangle: 2387,3664 2780,4060
  rectangle: 2377,3130 2770,3529
  rectangle: 2377,2600 2770,2999
  rectangle: 4017,2077 4346,2497

## Silkscreen, mask and mechanical layers (free items; w line width, h text height)
Top Overlay:
  text "Reset" at 3329.3,4800.01 h80 r359
  text "GND" at 4870,2933 h45
  text "+5V" at 5020,2933 h45
  text "signal" at 4669.21,2930.91 h45 r358
  text "+" at 2358.28,2501.72 h80 r45
  text "-" at 2350,2200 h80 r180
Bottom Overlay:
  drawing of 207 lines, arcs and shapes, not listed
  text "B2" at 2451.88,5723.64 h60
  text "B1" at 2550.85,5723.64 h60
  text "A1" at 2655.27,5723.64 h60
  text "A2" at 2785.29,5723.66 h60 r2
  text "B2" at 3331.03,5720 h60
  text "B1" at 3430,5720 h60
  text "A1" at 3534.42,5720 h60
  text "A2" at 3664.44,5720.02 h60 r2
  text "B2" at 4211.03,5720 h60
  text "B1" at 4310,5720 h60
  text "A1" at 4414.42,5720 h60
  text "A2" at 4544.44,5720.02 h60 r2
  text "B2" at 5081.03,5720 h60
  text "B1" at 5180,5720 h60
  text "A1" at 5284.42,5720 h60
  text "A2" at 5414.44,5720.02 h60 r2
  text "Y" at 4912.94,5699.02 h80 r21
  text "E1" at 2259.46,5696.36 h80
  text "E2" at 3128.61,5696.36 h80
  text "X" at 4028.61,5696.36 h80
  text "MICROSPEPS" at 6117.41,5392.95 h45
  text "MO" at 6125.91,5211.04 h45 r270
  text "M1" at 6125.92,5115.52 h45 r268
  text "M2" at 6127.5,5000 h45 r270
  text "FAN2" at 2313.64,4870 h80 r90
  text "EXP1 pins" at 3612.18,4802.73 h80
  text "BOOT0" at 4492,4776.4 h80
  text "GND" at 4954.96,4732.95 h45
  text "+5V" at 5095.18,4732.95 h45
  text "GND" at 4554.96,4702.95 h45
  text "+" at 2162.73,4687.5 h45 r135
  text "+5V" at 3383.54,4679.09 h45
  text "GND" at 3724.95,4672.95 h45
  text "WORK" at 4251.02,4652.95 h45 r359
  text "Boot0" at 4620.82,4622.95 h45
  text "Z" at 6167.22,4586.38 h80 r2
  text "XMIN" at 4880,4577.5 h45
  text "LCD7" at 3383,4572.95 h45
  text "LCD6" at 3720.95,4572.95 h45
  text "PRG" at 4554.96,4552.95 h45
  text "+3.3V" at 4294.91,4502.95 h45
  text "LCD5" at 3383.54,4475.45 h45
  text "LCD4" at 3715.04,4472.95 h45
  text "GND" at 4954,4468.5 h45
  text "+5V" at 5094.23,4468.5 h45
  text "FAN1" at 2310,4450 h80 r90
  text "B2" at 6130,4428.97 h60 r270
  text "+" at 2162.73,4377.5 h45 r135
  text "LCD_RS" at 3383.54,4366.48 h45
  text "LCD_E" at 3711.27,4362.96 h45
  text "+3.3V" at 4284.91,4352.95 h45
  text "B1" at 6130,4330 h60 r270
  text "YMIN" at 4879.43,4313.05 h45 r1
  text "BEEPER" at 3713.18,4262.95 h45
  text "ENC_BTN" at 3383.54,4257.5 h45
  text "SWDIO" at 4284.91,4252.95 h45
  text "Rx" at 4645.03,4252.95 h45 r1
  text "A1" at 6130,4225.58 h60 r270
  text "GND" at 4954,4208.5 h45
  text "+5V" at 5094.23,4208.5 h45
  text "Tx" at 4650,4157.5 h45
  text "SWCLK" at 4287.41,4152.95 h45
  text "A2" at 6130.02,4095.56 h60 r272
  text "GND" at 4284.96,4052.95 h45
  text "ZMIN" at 4879.04,4053.05 h45
  text "GND" at 4684.96,4042.95 h45
  text "EXTR2" at 2360,3990 h80 r90
  text "GND" at 4954,3959.5 h45
  text "+5V" at 5094.23,3959.5 h45
  text "NRST" at 4285.04,3942.95 h45
  text "+3.3" at 4708.68,3942.95 h45
  text "+" at 2268.28,3911.72 h80 r45
  text "BlTouch" at 5233.64,3890 h80 r90
  text "Z1" at 6165.82,3886.36 h80
  text "SWD" at 4405.18,3842.95 h45
  text "UART" at 4598.75,3842.95 h45 r359
  text "Zmin" at 5550.34,3830.91 h45 r359
  text "GND" at 5364.96,3822.95 h45
  text "XMAX" at 4903.23,3802.95 h45
  text "B2" at 5831.03,3780 h60
  text "B1" at 5930,3780 h60
  text "A1" at 6034.42,3780 h60
  text "A2" at 6164.44,3780.02 h60 r2
  text "GND" at 4954,3688.5 h45
  text "+5V" at 5094.23,3688.5 h45
  text "YMAX" at 4907.32,3532.96 h45
  text "GND" at 5370,3517.5 h45
  text "+5V" at 5524.18,3515.95 h45
  text "sig" at 5698.59,3503.92 h80 r14
  text "B2" at 5831.03,3480 h60
  text "B1" at 5930,3480 h60
  text "A1" at 6034.42,3480 h60
  text "A2" at 6164.44,3480.02 h60 r2
  text "GND" at 5300,3474.09 h45 r180
  text "EXTR1" at 2363.64,3470 h80 r90
  text "SCL" at 4135.91,3429.14 h45 r270
  text "GND" at 4953,3428.5 h45
  text "+5V" at 5093.23,3428.5 h45
  text "GND" at 4045.91,3425.04 h45 r270
  text "SDA" at 4255.91,3423 h45 r270
  text "+3.3V" at 5614.91,3422.95 h45
  text "+3.3V" at 3955.91,3405.09 h45 r270
  text "+" at 2278.28,3391.72 h80 r45
  text "TEXT2" at 5913.64,3280 h80 r90
  text "ZMAX" at 4893.23,3272.96 h45
  text "Z2" at 6165.82,3236.36 h80
  text "GND" at 5310,3204.09 h45 r180
  text "I2C" at 4193.45,3186.36 h80
  text "GND" at 4955,3168.5 h45
  text "+5V" at 5095.23,3168.5 h45
  text "T GND" at 6037.05,3160 h45 r90
  text "T GND" at 6037.05,3160 h45 r90
  text "+5V" at 5575.18,3152.95 h45
  text "GND" at 2992.28,3128.23 h45 r270
  text "SD_DET" at 3101.25,3128.23 h45 r270
  text "ENC_BTN1" at 3210.23,3128.23 h45 r270
  text "ENC_BTN2" at 3319.21,3128.23 h45 r270
  text "MISO" at 3413.87,3128.23 h45 r270
  text "EXP1" at 4639.28,3016.36 h80
  text "FILAMENT" at 5024.96,3012.96 h45
  text "SCK" at 3413.87,2935.04 h45 r270
  text "KILL" at 2992.29,2930.98 h45 r272
  text "BlTouch" at 5626.73,2916.36 h80
  text "MOSI" at 3195.91,2915.41 h45 r270
  text "NRST" at 3094.09,2903.18 h45 r270
  text "TEXT1" at 5913.64,2900 h80 r90
  text "EXP2" at 3932,2896.36 h80
  text "brown - GND" at 5628.5,2842.95 h45
  text "T GND" at 6042.5,2810 h45 r90
  text "SD_SEL" at 3312.05,2808.63 h45 r270
  text "red - 5V" at 5544.14,2780.06 h45
  text "+" at 2273.73,2725.55 h80 r135
  text "ornagge - signal" at 5697.14,2715.11 h45
  text "Sting Ray" at 4936,2648.8 h300 r2
  text "white - zmin" at 5605.64,2635.85 h45
  text "HEATBED" at 2272.73,2619.64 h80 r270
  text "+POWER-" at 2363.64,2580 h80 r90
  text "black - GND" at 5601.91,2572.95 h45
  text "12-24V" at 2483.64,2550 h80 r90
  text "TBED" at 5913.64,2510 h80 r90
  text "T GND" at 6042.5,2450 h45 r90
  text "+" at 2283.73,2438.99 h80 r45
  text "v0.1" at 5880,1990 h200
  text "Designed by Maygli mmaygli@gmail.com" at 4421.09,1942.73 h80

## Text inside footprints (layer, text, board x,y; h text height)
EXTRUDER1: Top Overlay "1" at 2209.68,3430 h39.37 r90; Top Overlay "2" at 2209.68,3229.66 h39.37 r89
EXTRUDER2: Top Overlay "1" at 2209.68,3950 h39.37 r90; Top Overlay "2" at 2209.68,3749.66 h39.37 r89
MICROSTEPS: Document "1" at 5809.21,5250.4 h20 r90; Document "2" at 5810.1,5147 h20 r90; Document "ON" at 5985,5295 h20 r270; Document "3" at 5809.84,5044.75 h20 r77
U2: Bottom Overlay "ENA" at 2245,5170 h50 r90; Bottom Overlay "M0" at 2345,5125.5 h50 r90; Bottom Overlay "M1" at 2445,5104.56 h50 r89; Bottom Overlay "M2" at 2545,5125.5 h50 r90; Bottom Overlay "RST" at 2645,5167.8 h50 r90; Bottom Overlay "SLP" at 2745,5163.2 h50 r90; Bottom Overlay "STP" at 2845,5167.8 h50 r90; Bottom Overlay "DIR" at 2945,5135.9 h50 r90; Bottom Overlay "GndL" at 2947.3,5399.1 h50 r90; Bottom Overlay "FLT" at 2847.3,5399.1 h50 r90; Bottom Overlay "A2" at 2747.3,5399.1 h50 r90; Bottom Overlay "A1" at 2647.3,5399.1 h50 r90; Bottom Overlay "B1" at 2547.3,5399.1 h50 r90; Bottom Overlay "B2" at 2447.3,5399.1 h50 r90; Bottom Overlay "GndM" at 2347.3,5399.1 h50 r90; Bottom Overlay "Vmot" at 2247.3,5399.1 h50 r90
U3: Bottom Overlay "ENA" at 3125,5170 h50 r90; Bottom Overlay "M0" at 3225,5125.5 h50 r90; Bottom Overlay "M1" at 3325,5104.56 h50 r89; Bottom Overlay "M2" at 3425,5125.5 h50 r90; Bottom Overlay "RST" at 3525,5167.8 h50 r90; Bottom Overlay "SLP" at 3625,5163.2 h50 r90; Bottom Overlay "STP" at 3725,5167.8 h50 r90; Bottom Overlay "DIR" at 3825,5135.9 h50 r90; Bottom Overlay "GndL" at 3827.3,5399.1 h50 r90; Bottom Overlay "FLT" at 3727.3,5399.1 h50 r90; Bottom Overlay "A2" at 3627.3,5399.1 h50 r90; Bottom Overlay "A1" at 3527.3,5399.1 h50 r90; Bottom Overlay "B1" at 3427.3,5399.1 h50 r90; Bottom Overlay "B2" at 3327.3,5399.1 h50 r90; Bottom Overlay "GndM" at 3227.3,5399.1 h50 r90; Bottom Overlay "Vmot" at 3127.3,5399.1 h50 r90
U4: Bottom Overlay "ENA" at 4005,5170 h50 r90; Bottom Overlay "M0" at 4102.3,5130 h50 r90; Bottom Overlay "M1" at 4205,5104.56 h50 r89; Bottom Overlay "M2" at 4305,5125.5 h50 r90; Bottom Overlay "RST" at 4405,5167.8 h50 r90; Bottom Overlay "SLP" at 4505,5163.2 h50 r90; Bottom Overlay "STP" at 4605,5167.8 h50 r90; Bottom Overlay "DIR" at 4705,5135.9 h50 r90; Bottom Overlay "GndL" at 4707.3,5399.1 h50 r90; Bottom Overlay "FLT" at 4607.3,5399.1 h50 r90; Bottom Overlay "A2" at 4507.3,5399.1 h50 r90; Bottom Overlay "A1" at 4407.3,5399.1 h50 r90; Bottom Overlay "B1" at 4307.3,5399.1 h50 r90; Bottom Overlay "B2" at 4207.3,5399.1 h50 r90; Bottom Overlay "GndM" at 4107.3,5399.1 h50 r90; Bottom Overlay "Vmot" at 4007.3,5399.1 h50 r90
U5: Bottom Overlay "ENA" at 4885,5170 h50 r90; Bottom Overlay "M0" at 4985,5125.5 h50 r90; Bottom Overlay "M1" at 5085,5104.56 h50 r89; Bottom Overlay "M2" at 5185,5125.5 h50 r90; Bottom Overlay "RST" at 5285,5167.8 h50 r90; Bottom Overlay "SLP" at 5385,5163.2 h50 r90; Bottom Overlay "STP" at 5485,5167.8 h50 r90; Bottom Overlay "DIR" at 5585,5135.9 h50 r90; Bottom Overlay "GndL" at 5587.3,5399.1 h50 r90; Bottom Overlay "FLT" at 5487.3,5399.1 h50 r90; Bottom Overlay "A2" at 5387.3,5399.1 h50 r90; Bottom Overlay "A1" at 5287.3,5399.1 h50 r90; Bottom Overlay "B1" at 5187.3,5399.1 h50 r90; Bottom Overlay "B2" at 5087.3,5399.1 h50 r90; Bottom Overlay "GndM" at 4987.3,5399.1 h50 r90; Bottom Overlay "Vmot" at 4887.3,5399.1 h50 r90
U6: Bottom Overlay "ENA" at 5580,4635 h50; Bottom Overlay "M0" at 5535.5,4535 h50; Bottom Overlay "M1" at 5519.56,4427.7 h50 r359; Bottom Overlay "M2" at 5535.5,4335 h50; Bottom Overlay "RST" at 5577.8,4235 h50; Bottom Overlay "SLP" at 5573.2,4135 h50; Bottom Overlay "STP" at 5577.8,4035 h50; Bottom Overlay "DIR" at 5545.9,3935 h50; Bottom Overlay "GndL" at 5809.1,3932.7 h50; Bottom Overlay "FLT" at 5809.1,4032.7 h50; Bottom Overlay "A2" at 5809.1,4132.7 h50; Bottom Overlay "A1" at 5809.1,4232.7 h50; Bottom Overlay "B1" at 5809.1,4332.7 h50; Bottom Overlay "B2" at 5809.1,4432.7 h50; Bottom Overlay "GndM" at 5810,4537.7 h50; Bottom Overlay "Vmot" at 5809.1,4632.7 h50